# EAGLE board modulo teste (EAGLE 9.2.1)
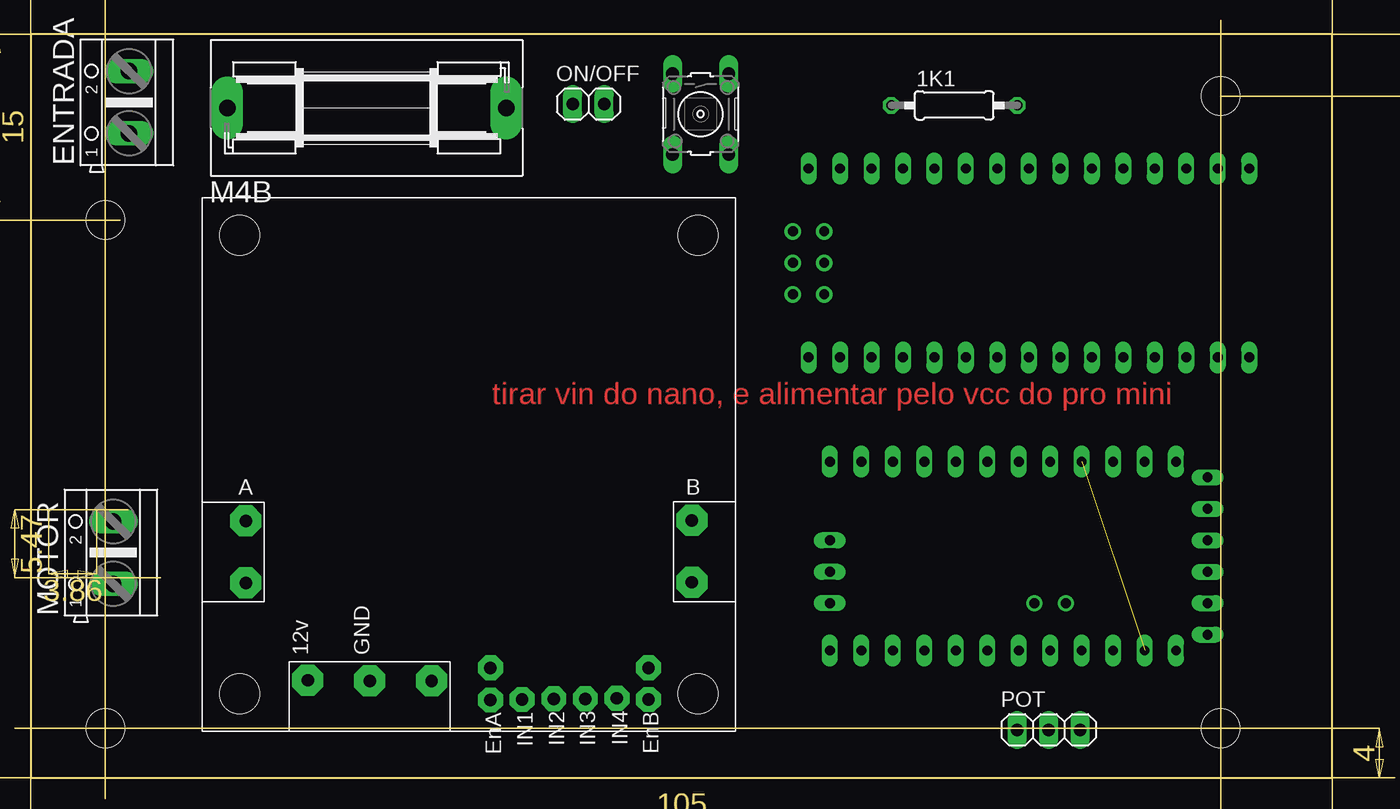
[diagram p0: board, top side]
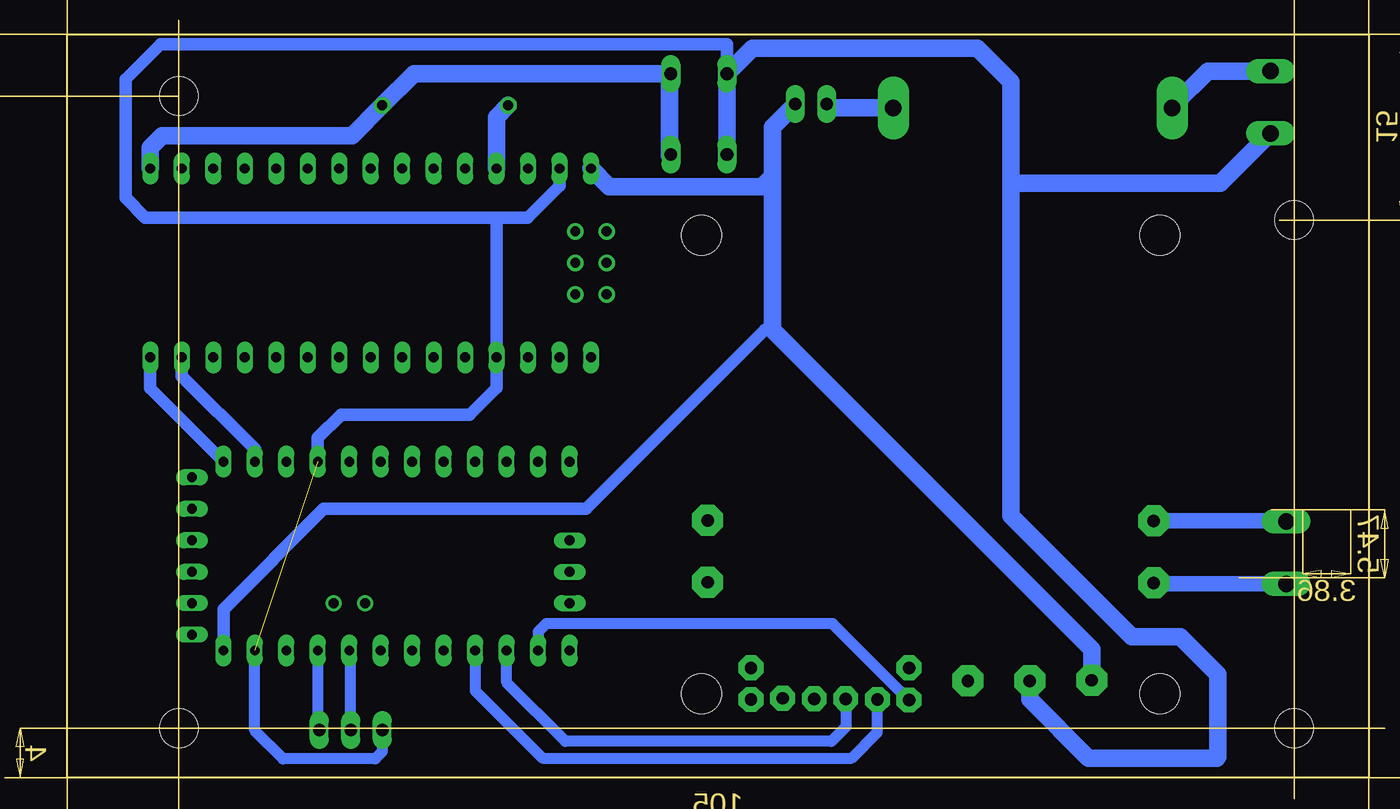
[diagram p1: board, bottom side, seen from below]

Size 105 x 60 mm. Coordinates in mm from the lower left corner, seen from the top.
Outline: 0,0 105,0 105,60 0,60 0,0
Copper layers (1*16): Top 0.035mm / dielectric 1.5mm / Bottom 0.035mm
Design rules "default": minimum track width 6mil, minimum drill 0.35mm, track to track 6mil, track to pad 6mil, pad to pad 6mil, via to via 6mil, smd to smd 6mil, copper to edge 40mil, drill to drill 6mil, minimum pad ring 10mil, minimum via ring 8mil, stop-mask expansion 4mil, vias tented up to drill 0mil, thermal gap 10mil
Holes 3.1 mm at 96,55 96,4 6,4 6,45
Milling: area -1.6,20.1 to -1,21.6; area -1.6,16.1 to -1,17.6; area -0.9,16.1 to 0.9,21.7; area 3.8,16.1 to 5.3,16.8; area 1.5,16.1 to 3,16.8; area 0.6,14.3 to 6.2,16.1; area 0,-3.7 to 1.5,-3.1; area 103.5,-3.7 to 105,-3.1; area 50.4,-3 to 54.6,-1.2; area -8.1,58.5 to -7.5,60; area -8.1,0 to -7.5,1.5; area -7.4,28.6 to -5.6,31.4; 15 more areas; 27 lines

## Footprints (pad centres in the part's own frame; a part is rotated, then mirrored left to right if it is on the bottom)
0207/10 = drill 0.813 octagon: 1 -5.08,0; 2 5.08,0
AK500/2 = drill 1.321 long: 1 -2.515,0; 2 2.515,0
SH22,5A = drill 1.321 pad 2.54 long: 1 -11.252,0; 2 11.252,0
1X02 = drill 1.016 long: 1 -1.27,0; 2 1.27,0
1X03 = drill 1.016 long: 1 -2.54,0; 2 0,0; 3 2.54,0
B3F-10XX = drill 1.016 long: 1 -3.251,2.261; 2 3.251,2.261; 3 -3.251,-2.261; 4 3.251,-2.261
ABK-PRO-MINI = drill 0.8 long: A0 10.16,-3.81; A1 10.16,-6.35; A2 10.16,-8.89; A3 10.16,-11.43; A6 3.81,-21.59; A7 6.35,-21.59; D2 -5.08,-3.81; D3 -5.08,-6.35; D4 -5.08,-8.89; D5 -5.08,-11.43; D6 -5.08,-13.97; D7 -5.08,-16.51; D8 -5.08,-19.05; D9 -5.08,-21.59; D10 10.16,-21.59; D11 10.16,-19.05; D12 10.16,-16.51; D13 10.16,-13.97; DTR 8.89,8.89; GND 10.16,3.81; GND1 -5.08,-1.27; GND2 -3.81,8.89; GND3 -1.27,8.89; GND4 1.27,-21.59; RAW 10.16,6.35; RST 10.16,1.27; RST1 -5.08,1.27; RX1 -5.08,3.81; RX1-1 3.81,8.89; TX0 -5.08,6.35; TX0-1 6.35,8.89; VCC 10.16,-1.27; VCC1 1.27,8.89 | drill 0.8: A4 6.35,-5.08; A5 6.35,-2.54
L298N = drill 1 pad 2.5 octagon: 12V 8.5,4.1; A1 3.5,16.95; A2 3.5,11.95; B1 39.5,17; B2 39.5,12; GND 13.5,4.05; P$7 18.5,4.05 | drill 1 pad 2 octagon: ENA 23.25,2.5; ENB 36,2.55; IN1 25.8,2.55; IN2 28.35,2.6; IN3 30.9,2.6; IN4 33.45,2.65; P$9 36,5.1; P$14 23.25,5.1 | hole 3.2: 3,40; 40,40; 40,3; 3,3
NANO = drill 0.8 long: 3.3V -10.16,24.13; 5V -10.16,-1.27; A0 -10.16,19.05; A1 -10.16,16.51; A2 -10.16,13.97; A3 -10.16,11.43; A4 -10.16,8.89; A5 -10.16,6.35; A6 -10.16,3.81; A7 -10.16,1.27; AREF -10.16,21.59; D2 5.08,1.27; D3 5.08,3.81; D4 5.08,6.35; D5 5.08,8.89; D6 5.08,11.43; D7 5.08,13.97; D8 5.08,16.51; D9 5.08,19.05; D10 5.08,21.59; D11 5.08,24.13; D12 5.08,26.67; D13 -10.16,26.67; GND -10.16,-6.35; GND1 5.08,-1.27; RAW -10.16,-8.89; RST -10.16,-3.81; RST1 5.08,-3.81; RX1 5.08,-6.35; TX0 5.08,-8.89 | drill 0.8: ICSP1 -5.08,-10.16; ICSP2 -5.08,-7.62; ICSP3 -2.54,-10.16; ICSP4 -2.54,-7.62; ICSP5 0,-10.16; ICSP6 0,-7.62

## Placement (x,y rotation side)
1K1  [0207/10]  74.5,54.25 0 top
ENTRADA  [AK500/2]  7.92,54.5 90 top
M4B  [SH22,5A]  27.09,54.05 0 top
MOTOR  [AK500/2]  6.64,18.17 90 top
ON/OFF  [1X02]  44.98,54.35 0 top
POT  [1X03]  82.12,3.88 0 top
RESET  [B3F-10XX]  54.03,53.55 270 top
U$1  ABK-PRO-MINI  [ABK-PRO-MINI]  86.05,20.44 270 top
U$2  L298N  [L298N]  13.83,3.78 0 top
U$3  NANO  [NANO]  71.63,39 270 top

## Library data of the parts
1K1 = resistor
ENTRADA MOTOR = con-ptr500; OC_FARNELL: unknown; OC_NEWARK: unknown
M4B = fuse; MPN: 0031.7701.11; OC_FARNELL: unknown; OC_NEWARK: 04F1224
ON/OFF POT = pinhead
RESET = switch-omron; MPN: B3F-1000; OC_FARNELL: 176432; OC_NEWARK: 36M3542
U$1 U$3 = arduino1
U$2 = acvoid

## Nets
ENA: U$1.D11 U$2.ENA
GND: ENTRADA.1 POT.1 RESET.3 RESET.4 U$1.GND U$1.GND1 U$2.GND U$3.GND U$3.GND1
IN1: U$1.D13 U$2.IN1
IN2: U$1.D12 U$2.IN2
N$1: ENTRADA.2 M4B.1
N$2: M4B.2 ON/OFF.1
N$3: MOTOR.2 U$2.A1
N$4: MOTOR.1 U$2.A2
N$11: POT.2 U$1.A0
N$12: POT.3 U$1.VCC
N$14: 1K1.2 RESET.1 RESET.2 U$3.D13
RX: U$1.RX1 U$3.D11
TX: U$1.TX0 U$3.D12
VCC: 1K1.1 U$3.5V
VIN: ON/OFF.2 U$1.RAW U$2.12V U$3.RAW

## Tracks (layer width: path | path; a pad name or v marks a point on that pad's centre or on a via)
ENA
  Bottom 0.9: U$2.ENA 43.25,12.45 66.35,12.45 67,11.8 U$1.D11
GND  (1 unrouted)
  Bottom 0.9: POT.1 79.58,2.12 80.16,1.54 87.59,1.54 89.86,3.81 U$1.GND
  Bottom 1: U$3.GND 65.28,47.77 67.85,45.2 70.3,45.2 | 70.3,45.2 98.7,45.2 100.3,46.8 100.3,56.35 97.45,59.2 51.77,59.2 RESET.3 | U$1.GND1 84.78,27.42 82.9,29.3 72.55,29.3 70.36,31.49 U$3.GND1 70.36,45.14 70.3,45.2
  Bottom 1.4: RESET.4 RESET.3 49.72,58.85 31.55,58.85 28.85,56.15 28.85,47.95 | U$2.GND 27.33,6.33 22.6,1.6 12.25,1.6 12.15,1.7 12.15,8.35 15.2,11.4 19.1,11.4 28.85,21.15 28.85,47.95 | ENTRADA.1 11.96,47.95 28.85,47.95
IN1
  Bottom 0.9: U$1.D13 72.08,7.03 66.65,1.6 41.7,1.6 39.63,3.67 U$2.IN1
IN2
  Bottom 0.9: U$2.IN2 42.18,4.12 43.35,2.95 64.8,2.95 69.54,7.69 U$1.D12
N$1
  Bottom 1.4: ENTRADA.2 12.99,57.02 15.65,54.35 | 15.65,54.35 16.35,53.65 | M4B.1 15.65,54.24 15.65,54.35
N$2
  Bottom 1.4: M4B.2 43.41,54.05 ON/OFF.1
N$3
  Bottom 1.27: U$2.A1 6.69,20.73 MOTOR.2
N$4
  Bottom 1.27: MOTOR.1 17.26,15.65 U$2.A2
N$11
  Bottom 0.9: POT.2 82.12,10.28 U$1.A0
N$12
  Bottom 0.9: U$1.VCC 84.78,3.88 POT.3
N$14
  Bottom 1.4: 56.4,56.69 RESET.1 77.03,56.8 1K1.2 82.03,51.8 97.35,51.8 98.3,50.85 U$3.D13 | 56.4,56.69 56.4,50.19 RESET.2 | 56.4,56.89 56.4,56.69
RX
  Bottom 1: U$1.RX1 89.86,26.49 89.85,26.5 95.76,32.41 U$3.D11
TX
  Bottom 1: U$1.TX0 98.3,31.42 U$3.D12
VCC
  Bottom 1.4: U$3.5V 70.36,53.31 1K1.1
VIN
  Bottom 1: U$1.RAW 92.4,13.6 84.3,21.7 63.15,21.7 48.7,36.15 48.1,36.15
  Bottom 1.4: ON/OFF.2 48.1,52.5 48.1,48.55 | 48.1,48.55 48.95,47.7 61.28,47.7 U$3.RAW | U$2.12V 22.33,10.38 48.1,36.15 48.1,48.55

## Text on the board
Top: tirar vin do nano, e alimentar pelo vcc do pro mini